# EAGLE board mouse (EAGLE 5.10)
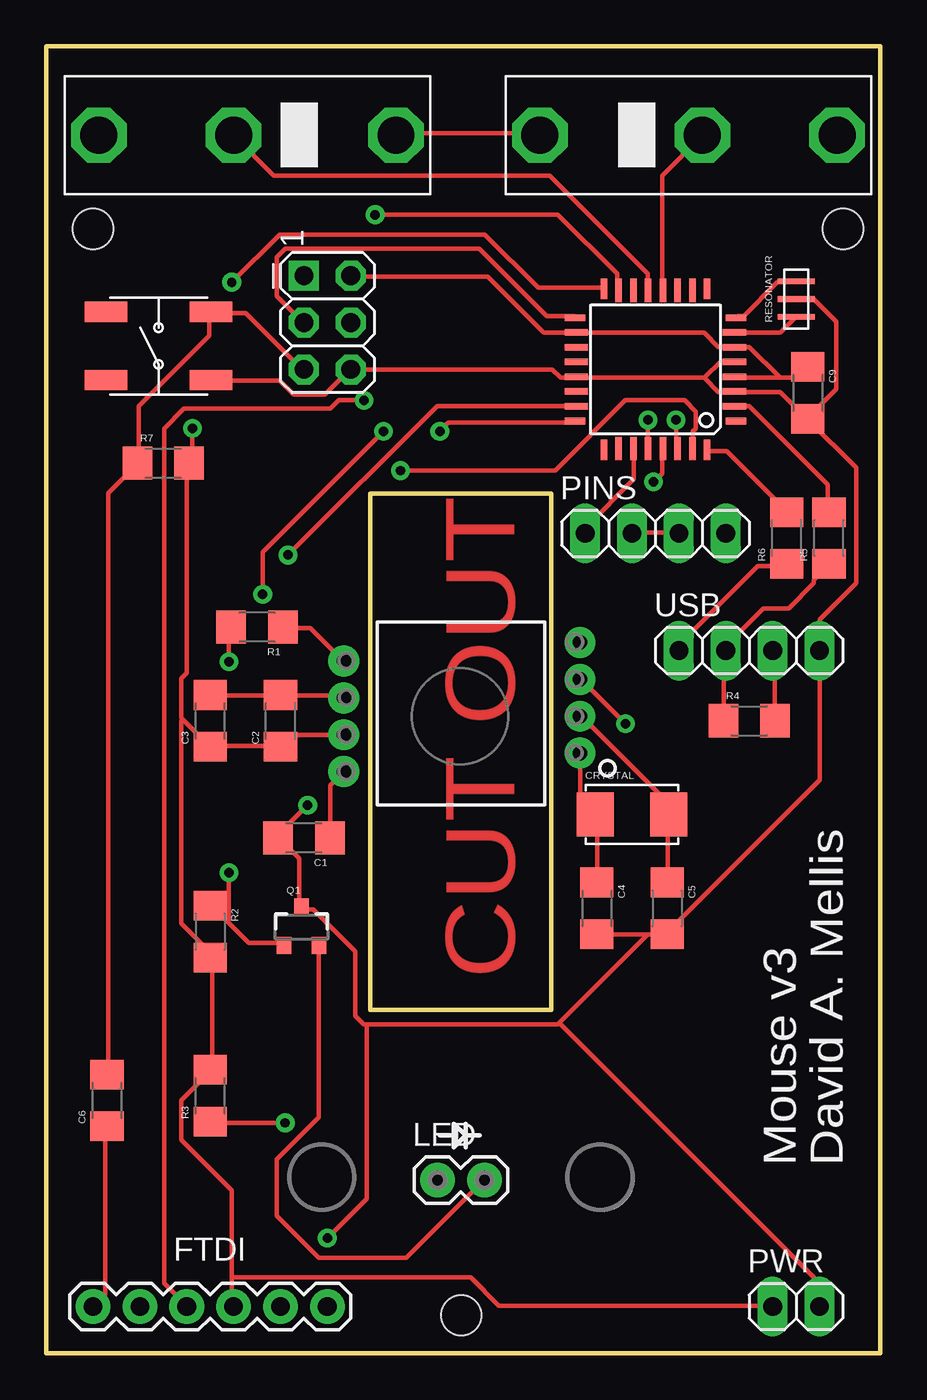
[diagram p0: board, top side]
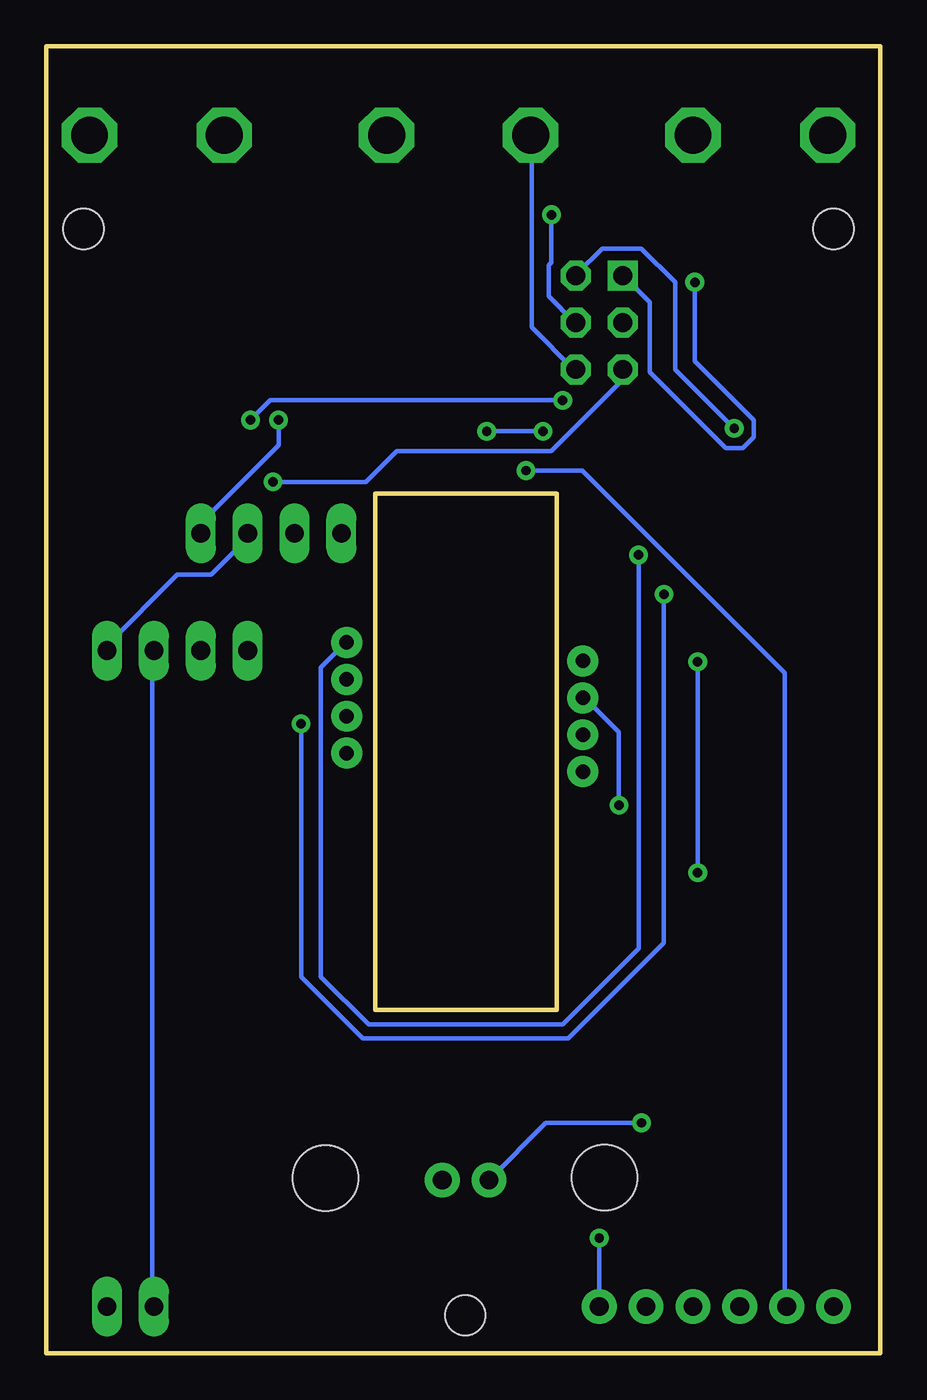
[diagram p1: board, bottom side, seen from below]

Size 45.21 x 70.87 mm. Coordinates in mm from the lower left corner, seen from the top.
Outline: 45.21,70.87 45.21,0 0,0 0,70.87 45.21,70.87
Outline: 27.38,46.61 27.38,18.62 17.55,18.62 17.55,46.61 27.38,46.61
Copper layers (1*16): Top 0.035mm / dielectric 1.5mm / Bottom 0.035mm
Design rules "SparkFun *": minimum track width 10mil, minimum drill 20mil, track to track 16mil, track to pad 16mil, pad to pad 16mil, via to via 16mil, smd to smd 8mil, copper to edge 20mil, drill to drill 20mil, minimum pad ring 12mil, minimum via ring 10mil, stop-mask expansion 4mil, vias tented up to drill 20mil, thermal gap 10mil
Holes 2.2 mm at 2.54,60.96 43.18,60.96
Milling: area 17.5,18.5 to 27.3,46.6

## Footprints (pad centres in the part's own frame; a part is rotated, then mirrored left to right if it is on the bottom)
1206 = smd 1.6 x 1.8: 1 -1.4,0; 2 1.4,0
2-SMD-5X3MM = smd 2 x 2.4: P$1 -2,0; P$2 2,0
1X06 = drill 1.016 pad 1.88 round: 1 0,0; 2 2.54,0; 3 5.08,0; 4 7.62,0; 5 10.16,0; 6 12.7,0
1X02 = drill 1.016 pad 1.88 round: 1 0,0; 2 2.54,0
1X04 = drill 1.016 long: 1 -3.81,0; 2 -1.27,0; 3 1.27,0; 4 3.81,0
1X02' = drill 1.016 long: 1 -1.27,0; 2 1.27,0
SOT23-3 = smd 0.8 x 0.9: 1 -0.95,-1; 2 0.95,-1; 3 0,1.1
CSTCE_V = smd 0.3 x 2: GND 0,0; P$1 -0.95,0; P$3 0.95,0
ADNS2610 = drill 0.787 pad 1.676 round: 1 -2.032,-6.477; 2 -0.032,-6.477; 3 1.968,-6.477; 4 3.968,-6.477; 5 2.968,6.323; 6 0.968,6.323; 7 -1.032,6.323; 8 -3.032,6.323 | hole 3.556: -25.044,7.493; -25.07,-7.62 | hole 2.184: -32.512,-0.051
TQFP32-08THIN = smd 1.118 x 0.356: 1 -4.369,2.8; 8 -4.369,-2.8; 17 4.369,-2.8; 24 4.369,2.8 | smd 1.27 x 0.356: 2 -4.293,2; 3 -4.293,1.2; 4 -4.293,0.4; 5 -4.293,-0.4; 6 -4.293,-1.2; 7 -4.293,-2; 18 4.293,-2; 19 4.293,-1.2; 20 4.293,-0.4; 21 4.293,0.4; 22 4.293,1.2; 23 4.293,2 | smd 0.356 x 1.118: 9 -2.8,-4.369; 16 2.8,-4.369; 25 2.8,4.369; 32 -2.8,4.369 | smd 0.356 x 1.27: 10 -2,-4.293; 14 1.2,-4.293; 15 2,-4.293; 26 2,4.293; 27 1.2,4.293; 31 -2,4.293 | smd 0.35 x 1.27: 11 -1.2,-4.293; 12 -0.4,-4.293; 13 0.4,-4.293; 28 0.4,4.293; 29 -0.4,4.293; 30 -1.2,4.293
2X03 = drill 1.016 square: 1 -2.54,-1.27 | drill 1.016 octagon: 2 -2.54,1.27; 3 0,-1.27; 4 0,1.27; 5 2.54,-1.27; 6 2.54,1.27
PTS525 = smd 2.3 x 1.1: P$1 -2.85,1.85; P$2 2.85,1.85; P$3 -2.85,-1.85; P$4 2.85,-1.85
SS-3GPD = drill 2 octagon: C -8.8,0; NC 7.3,0; NO 0,0

## Placement (x,y rotation side)
C1  2.2uF  [1206]  13.97,27.94 180 top
C2  0.1uF  [1206]  12.7,34.29 90 top
C3  10uF  [1206]  8.89,34.29 90 top
C4  18pF  [1206]  29.84,24.13 270 top
C5  18pF  [1206]  33.66,24.13 270 top
C6  0.1uF  [1206]  3.3,13.72 90 top
C9  0.1uF  [1206]  41.27,52.07 270 top
CRYSTAL  24 MHz  [2-SMD-5X3MM]  31.75,29.21 0 top
FTDI  [1X06]  2.54,2.54 0 top
LED  [1X02]  21.21,9.4 0 top
PINS  [1X04]  33.02,44.45 0 top
PWR  [1X02']  40.64,2.54 0 top
Q1  PNP  [SOT23-3]  13.84,23.11 0 top
R1  1k  [1206]  11.43,39.37 180 top
R2  100k  [1206]  8.89,22.86 270 top
R3  33  [1206]  8.89,13.97 90 top
R4  1.5K  [1206]  38.1,34.29 0 top
R5  68  [1206]  42.42,44.2 90 top
R6  68  [1206]  40.13,44.2 90 top
R7  10k  [1206]  6.35,48.26 0 top
RESONATOR  16 MHz  [CSTCE_V]  40.64,57.15 90 top
U1  ADNS2620  [ADNS2610]  22.45,34.57 90 top
U$2  ATMEGA328  [TQFP32-08THIN]  33.02,53.34 180 top
U$3  AVRISP  [2X03]  15.24,55.88 270 top
U$5  TACTILE_SWITCH  [PTS525]  6.1,54.61 180 top
U$6  SWITCH-SPDT  [SS-3GPD]  10.16,66.04 180 top
U$7  SWITCH-SPDT  [SS-3GPD]  35.56,66.04 0 top
USB  [1X04]  38.1,38.1 0 top

## Library data of the parts
C1-C6 C9 FTDI LED Q1 R1-R7 = SparkFun
CRYSTAL RESONATOR U1 U$5-U$7 = mellis
PINS PWR USB = pinhead
U$2 U$3 = fab

## Nets
GND: C1.2 C2.2 C3.2 C4.2 C5.2 C9.2 FTDI.6 PINS.2 PINS.3 PWR.2 Q1.3 RESONATOR.GND U1.6 U$2.3 U$2.5 U$2.21 U$3.6 U$5.P$1 U$6.C U$7.C USB.4
MISO: U$2.16 U$3.1
MOSI: U$2.15 U$3.4
N$1: RESONATOR.P$3 U$2.8
N$2: RESONATOR.P$1 U$2.7
N$3: C1.1 U1.8
N$4: R1.1 U1.5
N$5: Q1.1 R1.2 R2.1
N$6: LED.1 R3.1
N$7: LED.2 Q1.2
N$8: R6.2 U$2.32
N$9: C5.1 CRYSTAL.P$2 U1.2
N$10: C4.1 CRYSTAL.P$1 U1.1
N$11: U$2.12 U$7.NO
N$12: U$2.13 U$6.NO
N$13: PINS.1 U$2.27
N$14: PINS.4 U$2.28
N$18: R5.2 U$2.2
N$19: C6.1 FTDI.1
RES: C6.2 R7.1 U$2.29 U$3.5 U$5.P$3
RX: FTDI.3 U$2.30
SCK: U$2.17 U$3.3
SCL: U1.4 U$2.23
SDIO: U1.3 U$2.24
TX: FTDI.2 U$2.31
USBD+: R6.1 USB.1
USBD-: R4.1 R5.1 USB.2
VCC: C2.1 C3.1 C9.1 FTDI.4 PWR.1 R2.2 R3.2 R4.2 R7.2 U1.7 U$2.4 U$2.6 U$2.18 U$3.2 USB.3

## Tracks (layer width: path | path; a pad name or v marks a point on that pad's centre or on a via)
GND  (via drill 0.51)
  Top 0.254: PINS.2 31.85,44.5 34.29,44.5 PINS.3 | U$5.P$1 8.99,52.73 12.65,52.73 13.41,51.97 15.09,51.97 16.46,53.34 U$3.6 27.43,53.34 27.89,52.88 28.65,52.88 U$2.21 28.8,52.88 35.66,52.88 | C9.2 41.15,50.75 39.78,52.12 37.34,52.12 U$2.3 37.19,52.12 36.42,52.12 35.66,52.88 | 35.66,52.88 36.58,53.8 37.19,53.8 U$2.5 | RESONATOR.GND 41.6,57.15 42.82,55.93 42.82,52.27 41.3,50.75 C9.2 | C9.2 41.3,50.6 43.89,48.01 43.89,41.76 41.91,39.78 USB.4 41.91,31.09 33.68,22.86 C5.2 33.53,22.71 32.61,22.71 | C3.2 8.99,35.66 12.65,35.66 C2.2 12.8,35.66 16,35.66 U1.6 | 32.61,22.71 29.87,22.71 C4.2 | 17.37,17.83 27.74,17.83 27.81,17.91 | 17.37,17.83 17.22,17.83 16.76,18.29 16.76,21.79 14.48,24.08 13.87,24.08 Q1.3 13.72,24.23 13.72,26.82 12.65,27.89 C1.2 12.5,28.04 v14.17,29.72 | 27.81,17.91 32.61,22.71 | PWR.2 41.91,3.81 27.81,17.91 | v15.24,6.25 17.37,8.38 17.37,17.83 | U$6.C 19.05,66.14 26.67,66.14 U$7.C
  Bottom 0.254: USB.4 41.91,38.41 38.1,42.22 36.27,42.22 34.29,44.2 PINS.3 | FTDI.6 v15.24,6.25 | v14.17,29.72 14.17,33.68 16,35.51 U1.6 | U$6.C 18.9,65.99 18.9,55.63 16.61,53.34 U$3.6
MISO  (via drill 0.51)
  Top 0.254: v10.06,58.06 12.65,60.66 23.77,60.66 26.67,57.76 30.18,57.76 U$2.16
  Bottom 0.254: v10.06,58.06 10.06,53.8 6.86,50.6 6.86,49.68 7.47,49.07 8.38,49.07 12.5,53.19 12.5,57 13.87,58.37 U$3.1
MOSI  (via drill 0.51)
  Top 0.254: v17.83,61.72 27.74,61.72 30.94,58.52 30.94,57.76 U$2.15
  Bottom 0.254: v17.83,61.72 17.83,59.13 17.98,58.98 17.98,57.3 16.61,55.93 U$3.4
N$1
  Top 0.254: U$2.8 37.49,56.24 37.8,56.24 39.62,58.06 40.54,58.06 RESONATOR.P$3
N$2
  Top 0.254: U$2.7 37.34,55.32 39.78,55.32 40.54,56.08 RESONATOR.P$1
N$3
  Top 0.254: C1.1 15.39,28.04 15.39,30.79 16,31.39 U1.8
N$4
  Top 0.254: R1.1 12.95,39.32 14.33,39.32 16,37.64 U1.5
N$5  (via drill 0.51)
  Top 0.254: 9.83,23.39 8.99,24.23 R2.1 | 9.83,23.39 10.97,22.25 12.8,22.25 Q1.1 | v9.91,37.49 9.91,39.32 R1.2 | v9.91,26.06 9.91,23.47 9.83,23.39
  Bottom 0.254: v9.91,26.06 v9.91,37.49
N$6  (via drill 0.51)
  Top 0.254: v12.95,12.5 8.99,12.5 R3.1
  Bottom 0.254: v12.95,12.5 18.14,12.5 21.18,9.45 LED.1
N$7
  Top 0.254: Q1.2 14.78,22.1 14.78,12.8 12.5,10.52 12.5,7.47 14.78,5.18 19.51,5.18 23.62,9.3 LED.2
N$8
  Top 0.254: U$2.32 35.97,48.92 36.88,48.92 40.08,45.72 R6.2
N$9
  Top 0.254: C5.1 33.68,25.6 33.68,29.11 CRYSTAL.P$2 33.68,29.26 33.68,29.87 29.57,33.98 29.41,33.98 28.96,34.44 U1.2
N$10
  Top 0.254: C4.1 29.87,25.6 29.87,29.11 CRYSTAL.P$1 29.72,29.26 28.96,30.02 28.96,32.46 U1.1
N$11
  Top 0.254: U$2.12 33.38,57.76 33.38,63.86 U$7.NO
N$12
  Top 0.254: U$2.13 32.61,57.76 32.61,58.52 27.28,63.86 12.34,63.86 U$6.NO
N$13
  Top 0.254: U$2.27 31.85,48.92 31.85,47.4 29.26,44.81 29.26,44.5 PINS.1
N$14  (via drill 0.51)
  Top 0.254: v32.61,50.6 32.61,49.07 U$2.28
  Bottom 0.254: v32.61,50.6 32.61,49.23 36.73,45.11 36.73,44.5 PINS.4
N$18
  Top 0.254: U$2.2 37.34,51.36 38.1,51.36 42.37,47.09 42.37,45.72 R5.2
N$19
  Top 0.254: C6.1 3.2,12.19 3.2,3.2 FTDI.1
RES  (via drill 0.51)
  Top 0.254: v32.92,47.24 33.38,47.7 33.38,48.92 U$2.29 | U$3.5 13.87,53.34 10.82,56.39 8.99,56.39 U$5.P$3 8.84,56.39 8.84,55.17 5.03,51.36 5.03,48.31 R7.1 4.88,48.16 3.35,46.63 3.35,15.24 C6.2
  Bottom 0.254: v32.92,47.24 27.89,47.24 26.21,48.92 17.83,48.92 14.02,52.73 14.02,53.34 U$3.5
RX  (via drill 0.51)
  Top 0.254: v34.14,50.6 34.14,49.07 U$2.30 | v17.22,51.66 15.85,51.66 15.39,51.21 7.47,51.21 6.4,50.14 6.4,3.81 7.62,2.59 FTDI.3
  Bottom 0.254: v34.14,50.6 33.07,51.66 v17.22,51.66
SCK
  Top 0.254: U$2.17 28.65,56.24 27.13,56.24 23.47,59.89 12.95,59.89 12.5,59.44 12.5,57.3 13.87,55.93 U$3.3
SCL  (via drill 0.51)
  Top 0.254: v13.11,43.28 21.18,51.36 28.65,51.36 U$2.23
  Bottom 0.254: v13.11,43.28 13.11,21.95 17.22,17.83 27.74,17.83 30.33,20.42 30.33,37.19 28.96,38.56 U1.4
SDIO  (via drill 0.51)
  Top 0.254: v21.34,49.99 21.79,50.44 28.65,50.44 U$2.24 | v18.29,49.99 11.73,43.43 v11.73,41.15 | v31.39,34.14 28.96,36.58 U1.3
  Bottom 0.254: v18.29,49.99 v21.34,49.99 | v11.73,41.15 11.73,22.25 16.92,17.07 28.04,17.07 31.39,20.42 v31.39,34.14
TX  (via drill 0.51)
  Top 0.254: v19.2,47.85 27.58,47.85 31.39,51.66 34.59,51.66 35.2,51.05 35.2,50.14 35.05,49.99 35.05,49.07 U$2.31
  Bottom 0.254: v19.2,47.85 16.15,47.85 5.18,36.88 5.18,2.59 FTDI.2
USBD+
  Top 0.254: USB.1 34.29,38.41 38.56,42.67 40.08,42.67 R6.1
USBD-
  Top 0.254: R4.1 36.73,34.29 36.73,38.1 USB.2 36.88,38.1 36.88,38.41 38.86,40.39 40.23,40.39 41.6,41.76 41.6,41.91 42.37,42.67 R5.1
VCC  (via drill 0.51)
  Top 0.254: R4.2 39.47,34.29 39.47,38.1 USB.3 | 39.78,52.88 40.69,52.88 41.15,53.34 C9.1 | 39.78,52.88 37.34,52.88 U$2.4 | 39.78,52.88 38.1,54.56 37.34,54.56 U$2.6 37.19,54.56 36.42,54.56 35.66,55.32 28.8,55.32 U$2.18 28.65,55.32 26.98,55.32 23.93,58.37 16.61,58.37 U$3.2 | 10.06,4.12 10.06,8.84 7.32,11.58 7.32,13.72 8.84,15.24 R3.2 8.99,15.39 8.99,21.34 R2.2 8.84,21.49 8.84,21.79 7.32,23.32 7.32,34.29 7.39,34.37 | 10.06,4.12 10.06,2.59 FTDI.4 | 7.39,34.37 8.84,32.92 C3.1 8.99,32.92 12.65,32.92 C2.1 12.8,32.92 13.41,33.53 16,33.53 U1.7 | 7.39,34.37 7.32,34.44 7.32,36.58 7.62,36.88 7.62,48.16 R7.2 7.77,48.31 7.92,48.46 v7.92,50.14 | 10.06,4.12 23.01,4.12 24.54,2.59 39.32,2.59 PWR.1
  Bottom 0.254: PWR.1 39.47,2.59 39.47,38.1 USB.3 | v7.92,50.14 11.12,53.34 11.12,58.06 12.95,59.89 15.09,59.89 16.46,58.52 U$3.2

## Text on the board
Top: CUT OUT
tNames: Mouse v3 | David A. Mellis
tValues: - | - | D+ | D- | + | - | GRN | BLK | + | -